# Altium PCB PANUmbRev2.PcbDoc
Units mm, origin at the board's own origin, x right, y up, seen from the top; angles counter-clockwise.
Board outline 88.77 x 92.99 mm, 2 copper layers (Top Layer, Bottom Layer), stack 0.071 mm thick; 25 components, 49 nets, 243 pads, 24 vias.
Unrouted connection lines stored in the file: 64.
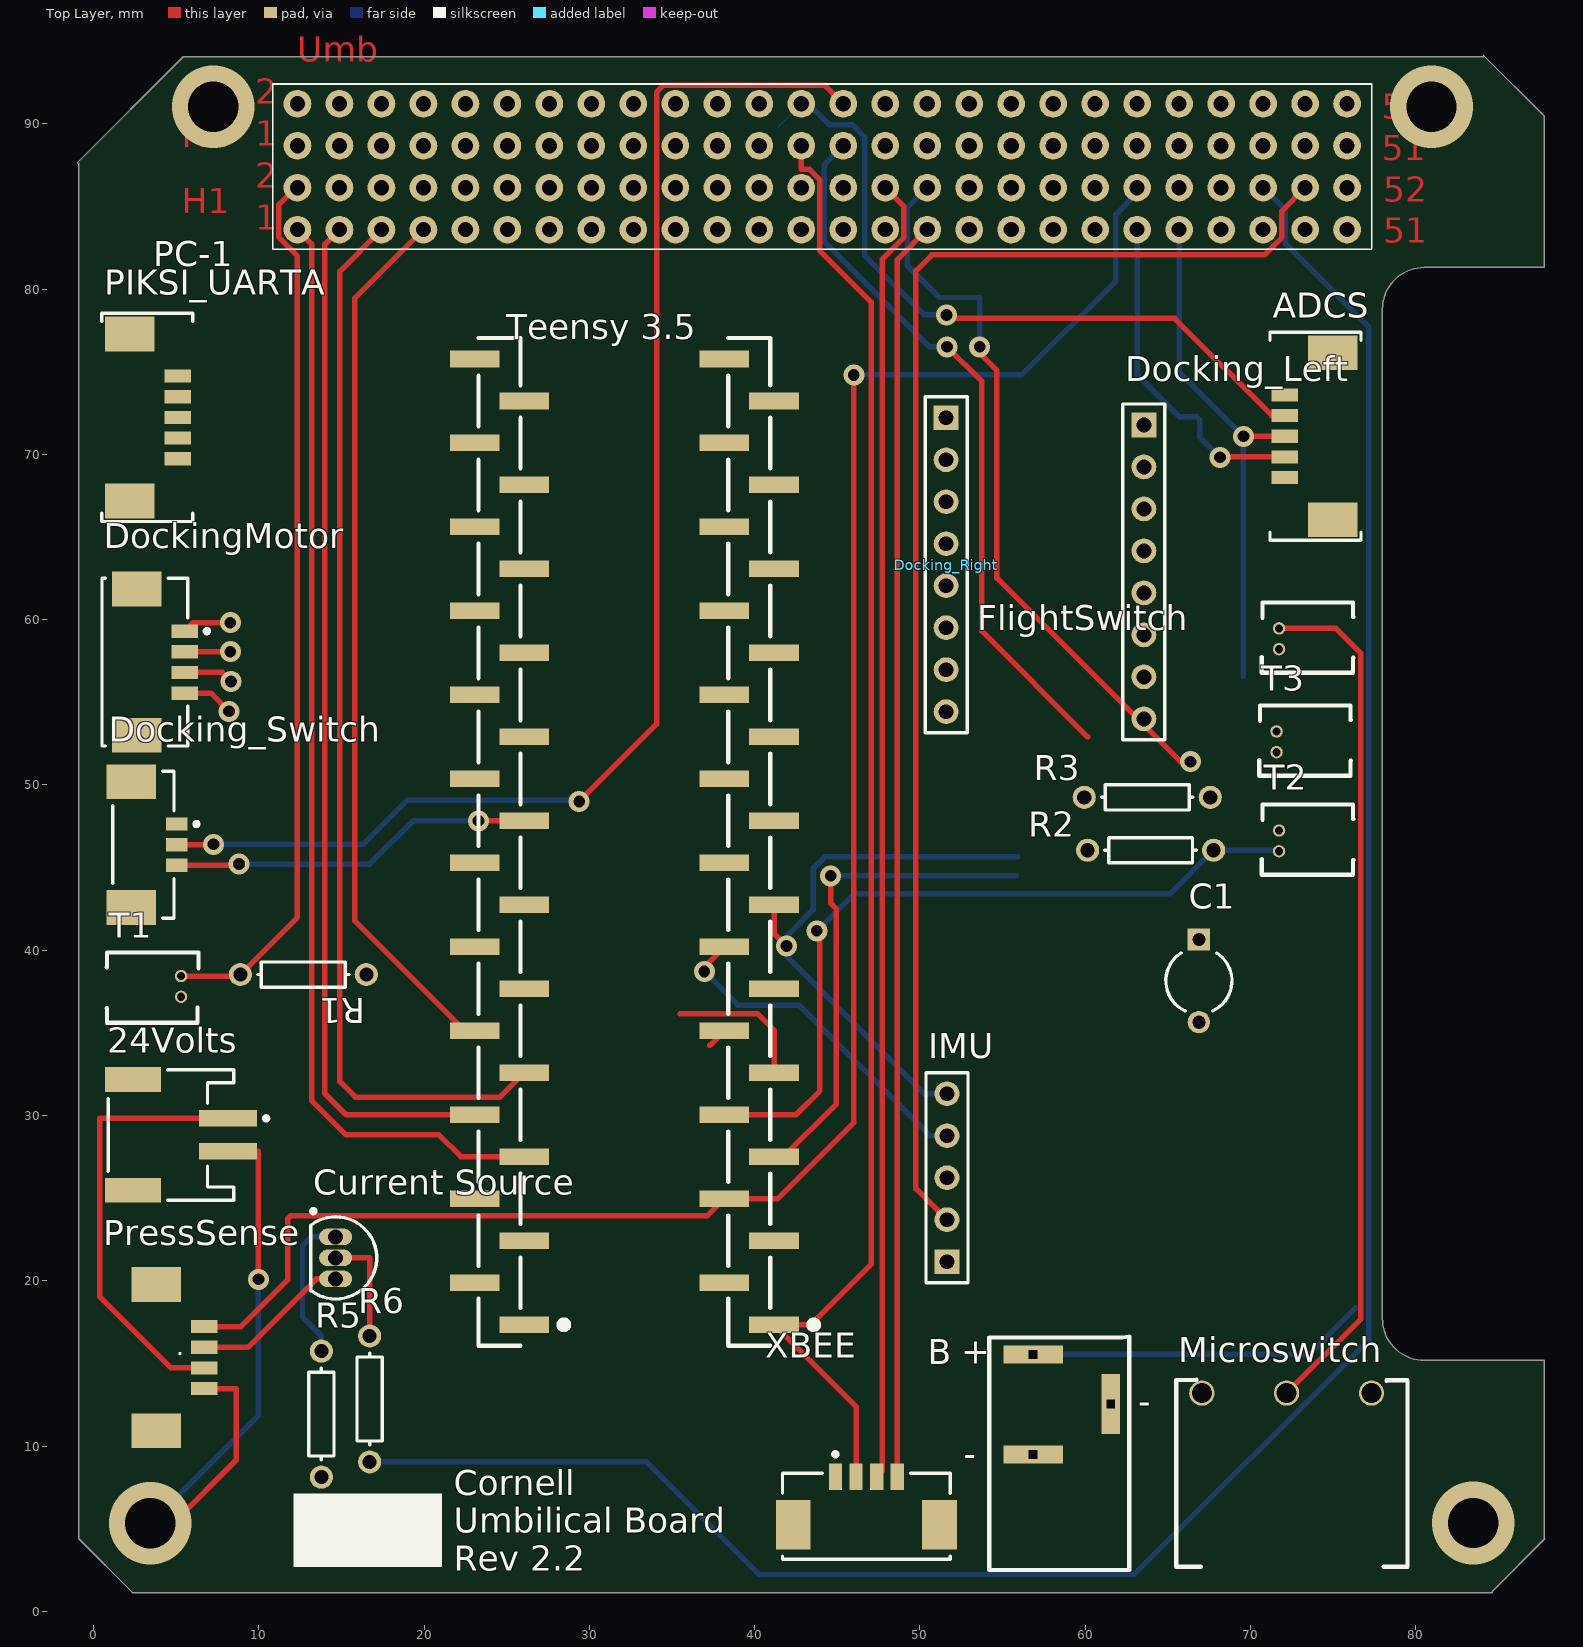
[diagram p0: Top Layer view]
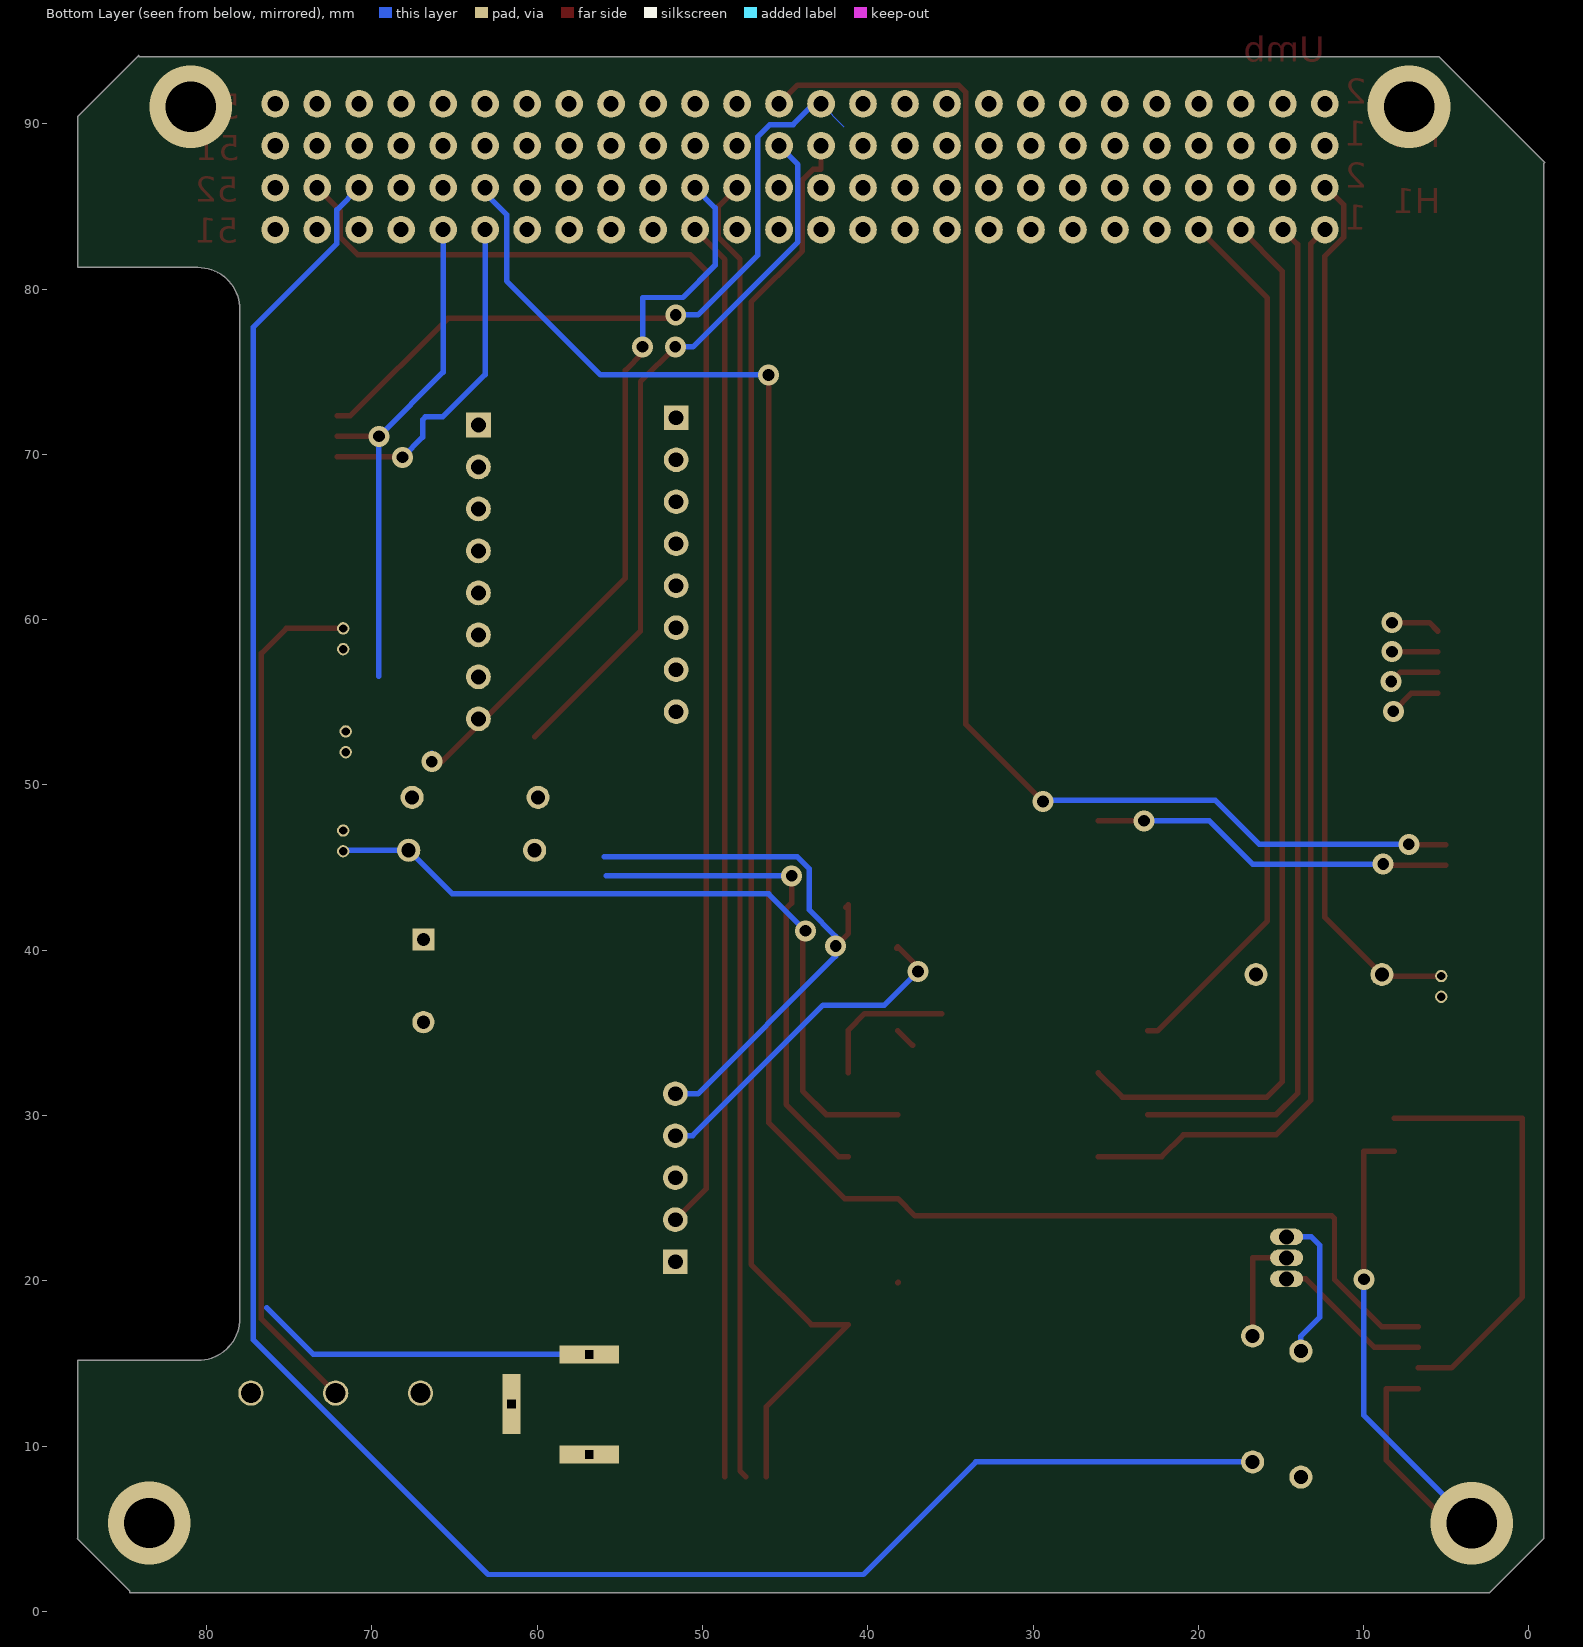
[diagram p1: Bottom Layer view, seen from below]

## Layer stack, top to bottom
Top Solder: solder mask 0.0102, Solder Resist, Dk 3.5
Top Layer: signal copper 0.0356
Bottom Layer: signal copper 0.0356
Bottom Solder: solder mask 0.0102, Solder Resist, Dk 3.5

## Board outline
87.782,81.305 80.518,81.305 ccw(c80.518,78.765) 77.978,78.765 77.978,17.729 ccw(c80.518,17.729) 80.518,15.189 87.782,15.189 87.782,4.42 87.808,4.394 84.633,1.219 84.633,1.143 2.362,1.143 -0.889,4.394 -0.889,87.579 -0.965,87.655 5.436,94.056 84.099,94.056 84.099,94.132 87.782,90.449

## Design rules (kind name [scope] priority, off if disabled: settings)
Clearance [All] p1: gap=0.254 ignorepadtopadclearanceinfootprint=FALSE except(0: Arc-Hole Track-Hole SMDPad-Hole THPad-Hole Via-Hole Fill-Hole Poly-Hole Region-Hole Text-Hole; 0.127: Track-Track Track-SMDPad Track-THPad SMDPad-SMDPad SMDPad-THPad THPad-THPad)
HoleSize [All] p1: absolutevalues=TRUE maxlimit=3.048 minlimit=0.025 maxpercent=80.000 minpercent=20.000
MinimumSolderMaskSliver [All] p1: minsoldermaskwidth=0.127
PlaneConnect [All] p1: planeconnectstyle=Direct reliefexpansion=0.508 reliefentries=4 reliefconductorwidth=0.254 reliefairgap=0.254
PolygonConnect [All] p1: connectstyle=Direct reliefconductorwidth=0.254 reliefentries=4 polygonreliefangle="90 Angle" airgapwidth=0.254
RoomDefinition PANUmbRev2 [InComponentClass('PANUmbRev2')] p1: confinementstyle=ConfineIn formatcopy=TRUE lockcomponents=FALSE outline -100,-100 -49.2,-100 -49.2,-74.6 -100,-74.6
RoutingVias [All] p1: holewidth=0.711 width=1.27 viastyle="Through Hole" minholewidth=0.711 minwidth=1.27 maxholewidth=0.711 maxwidth=1.27
SilkToSolderMaskClearance [IsPad] p1: minsilkscreentomaskgap=0.05 clearancetoexposedcopper=TRUE
SolderMaskExpansion [All] p1: expansion=0.102
Width [All] p1: maxlimit=0.559 minlimit=0.305 preferedwidth=0.33
26 further rules are at their usual default settings.

## Components (designator, comment, footprint, x,y, rotation, side; value= is the part's Value field where it differs from the comment)
24Volts "S2B-PH-SM4-TB(LF)(SN)" "JST- S2B-PH-SM4-TB(LF)(SN)-2_V" 4.699,28.829 r270 top
ADCS "PIKSI_UART Connector" "MOLEX PICOBLADE 5 PIN" 76.485,64.995 r90 top
B "Barrel_Jack" BARREL_JACK 56.845,9.5 r0 top
C1 "Cap2" CAPR5-4X5 66.878,38.151 r270 top value=100uF
"Current Source" "2N3904" TO-92A 14.656,21.387 r180 top
Docking_Left "Docking DRV8825 Header" HDR1X8 63.551,71.78 r270 top
Docking_Right "Docking DRV8825 Header" HDR1X8 51.587,72.212 r270 top
Docking_Switch "53398-0371" MOLX-53398-0371_V 3.029,46.386 r270 top
DockingMotor "53261-0471" MOLEX-53261-0471_V 4.064,57.429 r270 top
FlightSwitch "RemoverBeforeFlightSwitch" "REMOVERBEFOREFLIGHT SWITCH" 71.73,56.267 r90 top
IMU "Header 5" HDR1X5 51.638,21.158 r90 top
Microswitch "MicroSwitch" MICROSWITCH_3PIN 72.237,13.258 r180 top
PC-1 "PC-104" PC-104FOOTPRINT 12.344,83.591 r0 top
PIKSI_UARTA "PIKSI_UART Connector" "MOLEX PICOBLADE 5 PIN" 0.705,78.332 r270 top
PressSense "Connector 4POS Molex PicoBlade" 532610471 6.706,13.482 r0 top
R1 "Resistor" AXIAL-0.3 12.7,38.532 r180 top value=1K
R2 "Resistor" AXIAL-0.3 63.957,46.05 r0 top value=1K
R3 "Resistor" AXIAL-0.3 63.754,49.251 r0 top value=1K
R5 "Resistor" AXIAL-0.3 13.792,11.938 r90 top value=2.8k
R6 "Resistor" AXIAL-0.3 16.713,12.852 r270 top value=1k
T1 "TempSensor1" "RemoverBeforeFlight Switch" 5.302,40.391 r270 top
T2 "TempSensor1" "REMOVERBEFOREFLIGHT SWITCH" 71.73,44.039 r90 top
T3 "TempSensor1" "REMOVERBEFOREFLIGHT SWITCH" 71.577,50.033 r90 top
"Teensy 3.5" "61002418221" 61002418221 24.563,22.428 r90 top
XBEE "53261-0471" MOLEX-53261-0471_V 46.761,6.706 r0 top

## Footprints (in the part's own frame and the unit in brackets; to place one, negate y for a bottom-side part, rotate by r counter-clockwise, add the part's x,y. Pads: shape width x height; smd on the part's side, far side on the other; paste and mask are expansions set on the pad)
532610471 [mm] "Connector 4POS Molex PicoBlade"
  rect 1.6x0.8 smd: 1(0,3.75) 2(0,2.5) 3(0,1.25) 4(0,0)
  rect 3x2.1 smd: ""(-2.9,-2.55) ""(-2.9,6.3)
  silkscreen extent -1.52,2.07 -1.42,2.17, body extent -4.71,-3.81 1.02,7.56, height 0.6
61002418221 [mm]
  rect 1x3 smd: 1(-5.08,-1.5) 2(-2.54,1.5) 3(0,-1.5) 4(2.54,1.5) 5(5.08,-1.5) 6(7.62,1.5) 7(10.16,-1.5) 8(12.7,1.5) 9(15.24,-1.5) 10(17.78,1.5) 11(20.32,-1.5) 12(22.86,1.5) 13(25.4,-1.5) 14(27.94,1.5) 15(30.48,-1.5) 16(33.02,1.5) 17(35.56,-1.5) 18(38.1,1.5) 19(40.64,-1.5) 20(43.18,1.5) 21(45.72,-1.5) 22(48.26,1.5) 23(50.8,-1.5) 24(53.34,1.5) 25(53.34,-13.613) 26(50.8,-16.613) 27(48.26,-13.613) 28(45.72,-16.613) 29(43.18,-13.613) 30(40.64,-16.613) 31(38.1,-13.613) 32(35.56,-16.613) 33(33.02,-13.613) 34(30.48,-16.613) 35(27.94,-13.613) 36(25.4,-16.613) 37(22.86,-13.613) 38(20.32,-16.613) 39(17.78,-13.613) 40(15.24,-16.613) 41(12.7,-13.613) 42(10.16,-16.613) 43(7.62,-13.613) 44(5.08,-16.613) 45(2.54,-13.613) 46(0,-16.613) 47(-2.54,-13.613) 48(-5.08,-16.613)
  silkscreen extent -6.35,-19.21 54.61,1.27
AXIAL-0.3 [mm] "Axial Device, Thru-Hole; 2 Leads; 0.3 in Pin Spacing"
  round 1.4 hole 0.85: 1(-3.81,0) 2(3.81,0)
  silkscreen extent -2.77,-0.76 2.77,0.76
BARREL_JACK [mm] "KLDX-0202-B"
  rect 3.6x1.1 hole 0.5 square: 0(0,0) 2(0,6.05)
  rect 1.1x3.6 hole 0.5 square: 1(4.7,3.05)
  silkscreen extent -2.65,-7 5.82,7.12
CAPR5-4X5 [mm] "Capacitor; 2 Leads"
  rect 1.35x1.35 hole 0.8: 1(-2.5,0)
  round 1.35 hole 0.8: 2(2.5,0)
  silkscreen extent -1.69,-2 1.82,2
HDR1X5 [mm] "Connector; Header; 5 Position"
  rect 1.5x1.5 hole 0.9: 1(0,0)
  round 1.5 hole 0.9: 2(2.54,0) 3(5.08,0) 4(7.62,0) 5(10.16,0)
  silkscreen extent -1.27,-1.27 11.43,1.27
HDR1X8 [mm] "Connector; Header; 8 Position"
  rect 1.5x1.5 hole 0.9: 1(0,0)
  round 1.5 hole 0.9: 2(2.54,0) 3(5.08,0) 4(7.62,0) 5(10.16,0) 6(12.7,0) 7(15.24,0) 8(17.78,0)
  silkscreen extent -1.27,-1.27 19.05,1.27
"JST- S2B-PH-SM4-TB(LF)(SN)-2_V" [mm] "SMD, 2-Leads, Body 7.9x7.6mm, Pitch 2mm"
  rect 1x3.5 smd: 1(-1,3.45) 2(1,3.45)
  rect 1.5x3.4 smd: MP1(-3.35,-2.3) MP2(3.35,-2.3)
  silkscreen extent -3.95,-3.8 3.95,5.88, body extent -3.95,-3.8 3.95,4.8, height 5.6
MICROSWITCH_3PIN [mm] "Omron Electronics Inc-EMC Div D2FS-FL-N-A1"
  round 1.524 hole 1.2: 1(-5.08,0.05) 2(0.05,0.05) 3(5.18,0.05)
  silkscreen extent -7.25,-0.77 6.73,10.55, body extent -7.25,-0.75 6.73,10.55
"MOLEX PICOBLADE 5 PIN" [mm] "Molex Picoblade Header, SMT, Right Angle  53261-0571"
  rect 0.8x1.6 smd: 1(3.6,4.4) 2(4.85,4.4) 3(6.1,4.4) 4(7.35,4.4) 5(8.6,4.4)
  rect 2.1x3 smd: ""(1.05,1.5) ""(11.15,1.5)
  silkscreen extent -0.2,-0.2 12.4,5.3, body extent 0.4,0 11.8,5.2, height 3.4
MOLEX-53261-0471_V [mm] "SMD, 4-Leads, Body 10.15x5.2mm, Pitch 1.25mm"
  rect 0.8x1.6 smd: 1(-1.875,1.45) 2(-0.625,1.45) 3(0.625,1.45) 4(1.875,1.45)
  rect 2.1x3 smd: MP1(-4.425,-1.45) MP2(4.425,-1.45)
  silkscreen extent -5.08,-3.55 5.08,2.93, body extent -5.08,-3.55 5.07,1.65, height 3.4
MOLX-53398-0371_V [mm] "SMD, 3-Leads, Body 8.9x3.7mm, Pitch 1.25mm"
  rect 0.8x1.3 smd: 1(-1.25,2) 2(0,2) 3(1.25,2)
  rect 2.1x3 smd: MP1(-3.8,-0.75) MP2(3.8,-0.75)
  silkscreen extent -4.45,-1.85 4.45,3.33, body extent -4.45,-1.85 4.45,2.35, height 4.7
PC-104FOOTPRINT [mm]
  round 1.676 hole 0.914 mask+0.076: H1_1(0,0) H1_2(0,2.54) H1_3(2.54,0) H1_4(2.54,2.54) H1_5(5.08,0) H1_6(5.08,2.54) H1_7(7.62,0) H1_8(7.62,2.54) H1_9(10.16,0) H1_10(10.16,2.54) H1_11(12.7,0) H1_12(12.7,2.54) H1_13(15.24,0) H1_14(15.24,2.54) H1_15(17.78,0) H1_16(17.78,2.54) H1_17(20.32,0) H1_18(20.32,2.54) H1_19(22.86,0) H1_20(22.86,2.54) H1_21(25.4,0) H1_22(25.4,2.54) H1_23(27.94,0) H1_24(27.94,2.54) H1_25(30.48,0) H1_26(30.48,2.54) H1_27(33.02,0) H1_28(33.02,2.54) H1_29(35.56,0) H1_30(35.56,2.54) H1_31(38.1,0) H1_32(38.1,2.54) H1_33(40.64,0) H1_34(40.64,2.54) H1_35(43.18,0) H1_36(43.18,2.54) H1_37(45.72,0) H1_38(45.72,2.54) H1_39(48.26,0) H1_40(48.26,2.54) H1_41(50.8,0) H1_42(50.8,2.54) H1_43(53.34,0) H1_44(53.34,2.54) H1_45(55.88,0) H1_46(55.88,2.54) H1_47(58.42,0) H1_48(58.42,2.54) H1_49(60.96,0) H1_50(60.96,2.54) H1_51(63.5,0) H1_52(63.5,2.54) H2_1(0,5.08) H2_2(0,7.62) H2_3(2.54,5.08) H2_4(2.54,7.62) H2_5(5.08,5.08) H2_6(5.08,7.62) H2_7(7.62,5.08) H2_8(7.62,7.62) H2_9(10.16,5.08) H2_10(10.16,7.62) H2_11(12.7,5.08) H2_12(12.7,7.62) H2_13(15.24,5.08) H2_14(15.24,7.62) H2_15(17.78,5.08) H2_16(17.78,7.62) H2_17(20.32,5.08) H2_18(20.32,7.62) H2_19(22.86,5.08) H2_20(22.86,7.62) H2_21(25.4,5.08) H2_22(25.4,7.62) H2_23(27.94,5.08) H2_24(27.94,7.62) H2_25(30.48,5.08) H2_26(30.48,7.62) H2_27(33.02,5.08) H2_28(33.02,7.62) H2_29(35.56,5.08) H2_30(35.56,7.62) H2_31(38.1,5.08) H2_32(38.1,7.62) H2_33(40.64,5.08) H2_34(40.64,7.62) H2_35(43.18,5.08) H2_36(43.18,7.62) H2_37(45.72,5.08) H2_38(45.72,7.62) H2_39(48.26,5.08) H2_40(48.26,7.62) H2_41(50.8,5.08) H2_42(50.8,7.62) H2_43(53.34,5.08) H2_44(53.34,7.62) H2_45(55.88,5.08) H2_46(55.88,7.62) H2_47(58.42,5.08) H2_48(58.42,7.62) H2_49(60.96,5.08) H2_50(60.96,7.62) H2_51(63.5,5.08) H2_52(63.5,7.62)
  silkscreen extent -1.5,-1.19 65,8.81
"REMOVERBEFOREFLIGHT SWITCH" [mm] "Molex Picoblade Part Number: 53048-0210"
  round 0.75 hole 0.5: 1(1.95,0) 2(3.205,0)
  silkscreen extent 0.53,-4.5 4.78,1.05, body extent 0.53,-4.47 4.78,1.03, height 4.05
"RemoverBeforeFlight Switch" [mm] "Molex Picoblade Part Number: 53048-0210"
  round 0.75 hole 0.5: 1(1.95,0) 2(3.205,0)
  silkscreen extent 0.53,-4.5 4.78,1.05, body extent 0.53,-4.47 4.78,1.03, height 4.05
TO-92A [mm] "TO, Flat Index; 3 In-Line, Axial Leads; Body Dia. 4.5mm; Leads 0.51 x 0.48 mm (max)"
  oval 2x1 hole 0.9: 1(0,-1.27) 2(0,0) 3(0,1.27)
  silkscreen extent -2.48,-2.95 1.5,2.48, body extent -2.48,-2.5 1.5,2.5, height 6.86

## Part data
24Volts: library part CMP-1755-00001-1, "Male Header, Pitch 2 mm, 1 x 2 Position, Height 5.5 mm, -25 to 85 degC, RoHS, Tape and Reel", Colour=Black, Current rating="3 A", Max Operating Temperature=105degC, Min Operating Temperature=-65degC, Package Quantity=100, ComponentLink1Description="Manufacturer URL", ComponentLink1URL=http://www.jst.com/home2.html, ComponentLink2Description=Datasheet, ComponentLink2URL=http://www.jst-mfg.com/product/pdf/eng/ePH.pdf, Contact Finish=Lead, Contact material=Bronze, Contact Plating=Tin, DatasheetVersion=Dec-12, Height="8.13 mm", Lead Pitch="0.1 inch", Length="101.19 mm", Mount="Through Hole", PackageDescription="Male Header, Pitch 2 mm, 1 x 2 Position, Height 5.5 mm", PackageReference=S2B-PH-SM4-TB(LF)(SN)-2, Packaging=Bulk, Pins=40, Radiation Hardening=No, RoHSCompliant=True, Width="2.34 mm"
ADCS PIKSI_UARTA: "Molex Picoblade 53261-0571"
C1: "Capacitor", PackageDescription="Capacitor; 2 Leads", PackageReference=CAPR5-4X5, Published=23-Sep-2002, Publisher="Altium Limited"
"Current Source": "NPN General Purpose Amplifier", ComponentLink1Description="Manufacturer Link", ComponentLink1URL=http://www.fairchildsemi.com/, ComponentLink2Description=Datasheet, ComponentLink2URL=http://www.fairchildsemi.com/ds/2N%2F2N3904.pdf, DatasheetVersion=1997, LatestRevisionDate=15-Jan-2003, LatestRevisionNote="PCB Footprint 'BCY-W3/D4.7' replaced", PackageDescription="TO, Flat Index; 3 In-Line, Axial Leads; Body Dia. 4.5mm; Leads 0.51 x 0.48 mm (max)", PackageReference=TO-92A, PackageVersion=Sep-1998, Published=8-Jun-2000, Publisher="Altium Limited"
Docking_Left Docking_Right: library part "Header 8", "Header, 8-Pin", LatestRevisionDate=17-Jul-2002, LatestRevisionNote="Re-released for DXP Platform.", Publisher="Altium Limited"
Docking_Switch: library part CMP-2000-05634-1, "Male Header, Pitch 1.25 mm, 1 x 3 Position, Height 4.7 mm, -40 to 85 degC, RoHS, Tape and Reel", Current rating=1A, Manufacturer=Molex, Package Description="Male Header, Pitch 1.25 mm, 1 x 3 Position, Height 4.7 mm", Voltage rating=125V, =053398037153398-0371BULK, Brand=Molex, Contact material=PhosphorBronze, Contact Plating=Tin, Datasheet URL=http://www.molex.com/pdm_docs/sd/533980371_sd.pdf, Datasheet Version="Rev. J, 09/2015", Factory Pack Quantity=1000, Housing material=Nylon, Manufacturer URL=http://www.molex.com/, Mounting Angle=Vertical, Mounting Style=SMD/SMT, Mounting Technology=SurfaceMount, Number of Positions=3, Number of Positions / Contacts=3, Number of Rows=1, Package Reference=53398-0371, Packaging=Reel, Pitch=1.25mm, Product Category=Headers&WireHousings, Product Type=Headers, RoHS=Details, Series=53398, Termination Style=SMD, Tradename=PicoBlade, Type=Shrouded
DockingMotor XBEE: library part CMP-2000-05238-1, "Male Header, Pitch 1.25 mm, 1 x 4 Position, Height 3.4 mm, -40 to 85 degC, RoHS, Tape and Reel", Current rating=1A, Manufacturer=Molex, Package Description="1.25mm Pitch PicoBlade(TM) Header, Surface Mount, Right Angle, Lead-Free, 4 Circuits", Voltage rating=125V, =0532610471, Brand=Molex, Contact material=PhosphorBronze, Contact Plating=Tin, Datasheet URL=http://www.molex.com/pdm_docs/sd/532610471_sd.pdf, Datasheet Version="Rev. G, 01/2012", Factory Pack Quantity=1000, Housing material=Thermoplastic, Manufacturer URL=http://www.molex.com/, Mounting Angle=Right, Mounting Style=SMD/SMT, Number of Positions=4, Number of Positions / Contacts=4, Number of Rows=1, Packaging=Reel, Pitch=1.25mm, Product Category=Headers&WireHousings, Product Type=Headers, RoHS=Details, Series=53261, Termination Style=SMD, Tradename=PicoBlade, Type=Shrouded
FlightSwitch: "53048-0210 Molex Picoblade"
IMU: "Header, 5-Pin", LatestRevisionDate=17-Jul-2002, LatestRevisionNote="Re-released for DXP Platform.", Publisher="Altium Limited"
Microswitch: "Omron Electronics Inc-EMC Div D2FS-FL-N-A1"
PC-1: "ESQ-126-14-G-D (2 total needed)"
PressSense: library part 532610471
R1 R2 R3 R5 R6: library part Res1, LatestRevisionDate=17-Jul-2002, LatestRevisionNote="Re-released for DXP Platform.", PackageDescription="Axial Device, Thru-Hole; 2 Leads; 0.3 in Pin Spacing", PackageReference=AXIAL-0.3, Published=8-Jun-2000, Publisher="Altium Limited"
T1 T2 T3: library part RemoverBeforeFlightSwitch, "53048-0210 Molex Picoblade"
"Teensy 3.5": "Wurth Elektronik WR-PHD Series, Series Number 6100, 2.54mm Pitch 24 Way 1 Row Right Angle PCB Header", Manufacturer_Name="Würth Elektronik", RS Part Number=1216841, Datasheet Link=http://katalog.we-online.de/em/datasheet/6100xx18221.pdf, Geometry.Height=mm, Manufacturer_Part_Number=61002418221, Supplier_Name=RS

## Via types
v1: diameter 1.27, hole 0.711, Top Layer to Bottom Layer, 20 vias
v2: diameter 5, hole 3.048, Top Layer to Bottom Layer, 4 vias

## Nets (pads, with @x,y where several pads share a name; then routed paths per layer and width w, separated by ;. In a path a pad name is that pad's centre, name@x,y a point inside that pad or via, vN(x,y) a via of type N, cw(c..) or ccw(c..) an arc to the next point about the centre after c; other vN are vias at no path point)
3V3_1: PC-1.H2_27 R1.1 R2.1 R3.1 | length 43.6
  Top Layer w0.33: v1(51.638,76.505) 53.746,74.397 53.746,59.309 60.147,52.908
  Bottom Layer w0.33: PC-1.H2_27 44.221,87.528 44.221,82.855 50.571,76.505 v1(51.638,76.505) ; R2.1 R2.1@60.223,46.126
3V3_2: Docking_Switch.2 PC-1.H2_28 | length 82.3
  Top Layer w0.33: Docking_Switch.2 7.244,46.386 v1(7.264,46.406) ; v1(29.388,48.997) 34.074,53.683 34.074,91.921 34.495,92.342 44.234,92.342 PC-1.H2_28
  Bottom Layer w0.33: v1(7.264,46.406) 16.307,46.406 18.974,49.073 29.312,49.073 v1(29.388,48.997)
3V3_3: PC-1.H1_52
5V_1: "Teensy 3.5.48" PC-1.H2_25 XBEE.2 | length 88.3
  Top Layer w0.33: PC-1.H2_25 42.824,87.262 43.293,87.262 43.955,86.6 43.955,82.309 47.053,79.21 47.053,20.993 43.409,17.348 41.176,17.348 46.136,12.388 XBEE.2
5V_2: ADCS.4 PC-1.H2_26 | length 41.2
  Top Layer w0.33: v1(51.613,78.435) 51.816,78.232 65.405,78.232 71.292,72.345 ADCS.4
  Bottom Layer w0.33: PC-1.H2_26@43.031,91.418 43.117,91.418 43.117,91.332 44.507,89.941 45.923,89.941 46.66,89.205 46.66,82.042 50.267,78.435 v1(51.613,78.435)
5V_3: PC-1.H1_47 PIKSI_UARTA.5
5V_4: PC-1.H1_49
5V_5: PC-1.H1_51
5V_6: PC-1.H1_48 R6.2 | length 141.5
  Bottom Layer w0.33: R6.2 33.452,9.042 40.259,2.235 62.967,2.235 77.165,16.434 77.165,77.699 72.111,82.753 72.111,84.785 PC-1.H1_48
5V_7: IMU.2 PC-1.H1_50 | length 84.7
  Top Layer w0.33: IMU.2 49.759,25.578 49.759,81.102 50.724,82.067 70.839,82.067 71.895,83.123 71.895,84.722 PC-1.H1_50
5V_BattChargeIn: B.2 PC-1.H1_32 | length 65.3
  Top Layer w0.33: v1(53.619,76.505) 53.619,76.124 54.661,75.082 54.661,62.509 65.761,51.41 v1(66.37,51.41)
  Bottom Layer w0.33: PC-1.H1_32 49.225,84.912 49.225,81.44 51.176,79.489 53.619,79.489 v1(53.619,76.505) ; B.2 73.538,15.55 76.352,18.364 ; v1(66.37,51.41) v1@66.37,51.914
24V_2: 24Volts.1 C1.1 Docking_Right.1 PressSense.3 | length 26.7
  Top Layer w0.33: PressSense.3 4.691,14.732 0.39,19.033 0.39,29.829 24Volts.1
AGND: "Teensy 3.5.47" ADCS.1 PC-1.H2_31 T1.2 T2.2 T3.2 | length 0
  Top Layer w0.33: 38.151,19.914 38.176,19.888
DCDCmotor_EN: "Teensy 3.5.16" PC-1.H1_35
DCDCSAH_EN: "Teensy 3.5.17" PC-1.H1_37
DGND: 24Volts.2 "Teensy 3.5.1" "Teensy 3.5.34" ADCS.5 B.0 B.1 C1.2 Docking_Right.2 Docking_Right.8 Docking_Switch.1 FlightSwitch.1 IMU.3 Microswitch.3 PC-1.H2_29 PC-1.H2_30 PC-1.H2_32 PIKSI_UARTA.1 PressSense.4 R5.1 XBEE.1 | length 41.2
  Top Layer w0.33: v2(3.449,5.326) v2@4.818,5.326 ; v2@5.656,5.326 v2@4.818,5.326 ; PressSense.4 8.641,13.482 8.641,9.149 v2@4.818,5.326 ; 24Volts.2 9.982,27.829 v1(9.982,20.091) ; R5.1 R5.1@14.021,7.899
  Bottom Layer w0.33: v2(3.449,5.326) 9.982,11.859 v1(9.982,20.091)
Dock_Dir: "Teensy 3.5.40" Docking_Left.8 PC-1.H1_29
Dock_Reset: "Teensy 3.5.35" "Teensy 3.5.36" Docking_Left.5 Docking_Left.6 PC-1.H1_23 PC-1.H1_25
Dock_Step: "Teensy 3.5.37" Docking_Left.7 PC-1.H1_27
Dock_Switch: "Teensy 3.5.13" Docking_Switch.3 PC-1.H1_21 | length 22.1
  Top Layer w0.33: Docking_Switch.3 8.738,45.136 v1(8.814,45.212) ; v1(23.292,47.828) 26.063,47.828
  Bottom Layer w0.33: v1(8.814,45.212) 16.713,45.212 19.329,47.828 v1(23.292,47.828)
Motor1: Docking_Right.3 DockingMotor.1 | length 3
  Top Layer w0.33: DockingMotor.1 6.027,59.817 v1(8.28,59.817)
Motor2: Docking_Right.4 DockingMotor.2 | length 2.8
  Top Layer w0.33: DockingMotor.2 8.27,58.054 v1(8.28,58.064)
Motor3: Docking_Right.5 DockingMotor.3 | length 3
  Top Layer w0.33: DockingMotor.3 7.788,56.804 v1(8.331,56.261)
Motor4: Docking_Right.6 DockingMotor.4 | length 3.1
  Top Layer w0.33: DockingMotor.4 7.107,55.554 v1(8.204,54.458)
"NetCurrent Source_1": "Current Source.1" R5.2 | length 9.1
  Bottom Layer w0.33: R5.2 13.792,16.662 12.649,17.805 12.649,22.149 13.157,22.657 14.656,22.657
"NetCurrent Source_2": "Current Source.2" R6.1 | length 6.8
  Top Layer w0.33: 14.656,21.387 16.713,21.387 R6.1
"NetCurrent Source_3": "Current Source.3" PressSense.2 | length 9.7
  Top Layer w0.33: PressSense.2 9.353,15.982 13.487,20.117 14.656,20.117
NetFlightSwitch_2: FlightSwitch.2 Microswitch.2 | length 52.2
  Top Layer w0.33: FlightSwitch.2 75.174,59.472 76.683,57.963 76.683,17.704 Microswitch.2
Piksi_RX: "Teensy 3.5.3" PC-1.H1_19 PIKSI_UARTA.2
Piksi_TX: "Teensy 3.5.2" PC-1.H1_17 PIKSI_UARTA.3
PressSense: "Teensy 3.5.45" PC-1.H1_42 PressSense.1 | length 116.2
  Top Layer w0.33: PressSense.1 8.918,17.232 11.76,20.074 11.76,23.774 11.913,23.927 37.135,23.927 38.176,24.968 41.402,24.968 45.999,29.566 v1(45.999,74.803)
  Bottom Layer w0.33: v1(45.999,74.803) 56.159,74.803 61.849,80.493 61.849,84.506 63.144,85.801 PC-1.H1_42
Quake_EN: "Teensy 3.5.42" PC-1.H1_14 | length 8.7
  Top Layer w0.33: 35.509,36.17 40.183,36.17 41.176,35.176 41.176,32.588
Quake_RX: "Teensy 3.5.10" PC-1.H1_15
Quake_TX: "Teensy 3.5.9" PC-1.H1_13
SCL: "Teensy 3.5.38" ADCS.3 IMU.5 PC-1.H1_43 | length 66.5
  Top Layer w0.33: 41.339,42.586 41.176,42.748 41.176,41.018 v1(41.935,40.259) v1@41.935,40.75 ; v1(69.571,71.095) ADCS.3
  Bottom Layer w0.33: IMU.5 50.267,31.318 41.935,39.649 v1(41.935,40.259) 41.935,40.843 43.548,42.456 43.548,44.937 44.255,45.644 55.931,45.644 ; PC-1.H1_43 65.684,74.981 v1(69.571,71.095) 69.571,56.566
SDA: "Teensy 3.5.39" ADCS.2 IMU.4 PC-1.H1_41 | length 41.3
  Top Layer w0.33: v1(36.957,38.71) 36.957,38.989 38.176,40.208 38.252,40.132 ; v1(68.148,69.825) 68.168,69.845 ADCS.2
  Bottom Layer w0.33: v1(36.957,38.71) 38.989,36.678 42.697,36.678 50.597,28.778 IMU.4 ; PC-1.H1_41 63.144,74.828 65.709,72.264 66.759,72.264 66.93,72.093 66.93,71.043 v1(68.148,69.825)
Temp1: "Teensy 3.5.41" PC-1.H1_2 R1.2 T1.1 | length 54.9
  Top Layer w0.33: T1.1 8.799,38.441 R1.2 12.344,41.986 12.344,81.993 11.214,83.123 11.214,85.115 12.231,86.131 PC-1.H1_2 ; 37.287,34.239 38.176,35.128
Temp2: "Teensy 3.5.43" PC-1.H1_4 R2.2 T2.1 | length 46.1
  Top Layer w0.33: 38.176,30.048 42.494,30.048 43.942,31.496 43.942,40.996 v1(43.764,41.173)
  Bottom Layer w0.33: v1(43.764,41.173) 45.999,43.409 65.126,43.409 R2.2 71.668,46.05 T2.1
Temp3: "Teensy 3.5.44" PC-1.H1_6 R3.2 T3.1 | length 30.3
  Top Layer w0.33: 41.176,27.508 41.758,27.508 44.933,30.683 44.933,42.52 44.602,42.85 v1(44.602,44.501)
  Bottom Layer w0.33: v1(44.602,44.501) 55.829,44.501
V_BAT_1: PC-1.H2_45
V_BAT_2: PC-1.H2_46
Valve1: "Teensy 3.5.5" PC-1.H1_1 | length 67.3
  Top Layer w0.33: PC-1.H1_1 13.208,82.728 13.208,30.912 15.291,28.829 20.904,28.829 22.225,27.508 26.063,27.508
Valve2: "Teensy 3.5.6" PC-1.H1_3 | length 62.2
  Top Layer w0.33: PC-1.H1_3 13.995,82.702 13.995,31.344 15.291,30.048 23.063,30.048
Valve3: "Teensy 3.5.7" PC-1.H1_5 | length 64.7
  Top Layer w0.33: PC-1.H1_5 14.91,81.077 14.91,32.055 15.85,31.115 24.59,31.115 26.063,32.588
Valve4: "Teensy 3.5.8" PC-1.H1_7 | length 53.9
  Top Layer w0.33: PC-1.H1_7 15.824,79.451 15.824,41.783 22.479,35.128 23.063,35.128
  Bottom Layer w0.33: PC-1.H1_7@19.583,83.591 PC-1.H1_7
Valve5: "Teensy 3.5.11" PC-1.H1_9
Valve6: "Teensy 3.5.12" PC-1.H1_11
XBEE_RX: "Teensy 3.5.24" PC-1.H1_30 XBEE.3 | length 79.1
  Top Layer w0.33: XBEE.3 47.727,8.496 47.727,81.815 49.035,83.123 49.035,85.001 PC-1.H1_30
XBEE_TX: "Teensy 3.5.23" PC-1.H1_31 XBEE.4 | length 76.2
  Top Layer w0.33: XBEE.4 48.636,81.783 PC-1.H1_31
pads on no net: 24Volts.MP1 24Volts.MP2 "Teensy 3.5.4" "Teensy 3.5.14" "Teensy 3.5.15" "Teensy 3.5.18" "Teensy 3.5.19" "Teensy 3.5.20" "Teensy 3.5.21" "Teensy 3.5.22" "Teensy 3.5.25" "Teensy 3.5.26" "Teensy 3.5.27" "Teensy 3.5.28" "Teensy 3.5.29" "Teensy 3.5.30" "Teensy 3.5.31" "Teensy 3.5.32" "Teensy 3.5.33" "Teensy 3.5.46" ADCS. Docking_Left.1 Docking_Left.2 Docking_Left.3 Docking_Left.4 Docking_Right.7 Docking_Switch.MP1 Docking_Switch.MP2 DockingMotor.MP1 DockingMotor.MP2 IMU.1 Microswitch.1 PC-1.H1_8 PC-1.H1_10 PC-1.H1_12 PC-1.H1_16 PC-1.H1_18 PC-1.H1_20 PC-1.H1_22 PC-1.H1_24 PC-1.H1_26 PC-1.H1_28 PC-1.H1_33 PC-1.H1_34 PC-1.H1_36 PC-1.H1_38 PC-1.H1_39 PC-1.H1_40 PC-1.H1_44 PC-1.H1_45 PC-1.H1_46 PC-1.H2_1 PC-1.H2_2 PC-1.H2_3 PC-1.H2_4 PC-1.H2_5 PC-1.H2_6 PC-1.H2_7 PC-1.H2_8 PC-1.H2_9 PC-1.H2_10 PC-1.H2_11 PC-1.H2_12 PC-1.H2_13 PC-1.H2_14 PC-1.H2_15 PC-1.H2_16 PC-1.H2_17 PC-1.H2_18 PC-1.H2_19 PC-1.H2_20 PC-1.H2_21 PC-1.H2_22 PC-1.H2_23 PC-1.H2_24 PC-1.H2_33 PC-1.H2_34 PC-1.H2_35 PC-1.H2_36 PC-1.H2_37 PC-1.H2_38 PC-1.H2_39 PC-1.H2_40 PC-1.H2_41 PC-1.H2_42 PC-1.H2_43 PC-1.H2_44 PC-1.H2_47 PC-1.H2_48 PC-1.H2_49 PC-1.H2_50 PC-1.H2_51 PC-1.H2_52 PIKSI_UARTA. PIKSI_UARTA.4 PressSense. XBEE.MP1 XBEE.MP2
copper on no net: | length 2
  Bottom Layer w0: 41.415,89.802 42.824,91.211
  other v2: 83.469,5.351 7.249,91.026 80.949,91.026

## Silkscreen, mask and mechanical layers (free items; w line width, h text height)
Top Overlay:
  rectangle: 12.09,2.692 21.082,7.137
  text "Cornell  / Umbilical Board  / Rev 2.2" at 21.793,2.464 h1.52
Mechanical 1:
  rectangle: 50.241,19.99 75.641,32.69
Mechanical 2:
  lines w0.762: 77.993,77.394 78.018,77.419 ; 78.003,19.101 78.003,77.394 ; 78.036,19.108 ccw(c81.656,19.088) 81.661,15.469 ; 78.051,77.539 cw(c81.671,77.559) 81.676,81.178 86.756,81.178 87.645,81.178 ; 81.712,15.418 87.62,15.418 87.62,4.633 ; 87.63,4.623 84.328,1.321 2.21,1.321 -1.016,4.547 -1.016,87.808 5.385,94.209 83.998,94.209 87.63,90.576 87.63,81.356

## Text inside footprints (layer, text, board x,y; h text height)
B: Top Overlay "-" at 52.645,8.775 h1.52; Top Overlay "-" at 63.22,11.95 h1.52; Top Overlay "+" at 52.495,15 h1.52
PC-1: Top Layer "52" at 77.944,90.291 h1.52; Top Layer "51" at 77.944,87.791 h1.52; Top Layer "52" at 78.044,85.291 h1.52; Top Layer "51" at 78.044,82.791 h1.52; Top Layer "2" at 9.804,91.211 h1.52; Top Layer "1" at 9.804,88.671 h1.52; Top Layer "2" at 9.804,86.131 h1.52; Top Layer "1" at 9.804,83.591 h1.52; Top Layer "H2" at 5.344,88.591 h1.52; Top Layer "H1" at 5.344,84.591 h1.52; Top Layer "Umb" at 12.344,93.751 h1.52; Mechanical 1 "J1" at 51.751,87.485 h0.76